# EAGLE board SLIM-ADC-16 (EAGLE 6.3)

Size 30.48 x 30.48 mm. Coordinates in mm from the lower left corner, seen from the top.
Outline: 0,0 30.48,0 30.48,30.48 0,30.48 0,0
Copper layers (1*16): Top 0.035mm / dielectric 1.5mm / Bottom 0.035mm
Design rules "SSA *": minimum track width 8mil, minimum drill 13mil, track to track 6mil, track to pad 6mil, pad to pad 6mil, via to via 6mil, smd to smd 0mil, copper to edge 0mil, drill to drill 8mil, minimum pad ring 7mil, minimum via ring 7mil, stop-mask expansion 0mil, vias tented up to drill 25mil, thermal gap 10mil

## Footprints (pad centres in the part's own frame; a part is rotated, then mirrored left to right if it is on the bottom)
0805 = smd 0.8 x 1.2: 1 -0.9,0; 2 0.9,0
EIA3216 = smd 1.4 x 1.6: A 1.4,0; C -1.4,0
SLIM_COAX_PAD = drill 1.5: P$1 0,0 | smd 1.27 x 0.635 bottom: P$2 0,-2.667
CONN-6PIN = drill 1.016 square: 1 -6.35,0 | drill 1.016: 2 -3.81,0; 3 -1.27,0; 4 1.27,0; 5 3.81,0; 6 6.35,0
SOT23 = smd 0.8 x 0.9: B 0.95,1; C 0,-1; E -0.95,1
CONN-3PIN = drill 1.016 square: 1 -2.54,0 | drill 1.016: 2 0,0; 3 2.54,0
SOT89 = smd 1.2 x 1.5: 1 -1.6,-2; 3 1.6,-2 | smd 1 x 1.5: 2 0,-2 | smd 2.4 x 3: 4 0,1.25
MSOP10 = smd 0.34 x 1.04: 1 -1,-2.2; 2 -0.5,-2.2; 3 0,-2.2; 4 0.5,-2.2; 5 1,-2.2; 6 1,2.2; 7 0.5,2.2; 8 0,2.2; 9 -0.5,2.2; 10 -1,2.2

## Placement (x,y rotation side)
C1  0.1uF  [0805]  3,8 0 top
C2  0.1uF  [0805]  7.5,3.5 270 top
C3  10uF/16V  [EIA3216]  4,4 0 top
C4  10uF/16V  [EIA3216]  17.5,5 90 top
C5  0.1uF  [0805]  14.5,4.5 270 top
C6  0.1uF  [0805]  21,10 0 top
C7  10uF/16V  [EIA3216]  21.5,12.5 180 top
C8  10uF/16V  [EIA3216]  27,16.5 270 top
C9  0.1uF  [0805]  25.5,13 180 top
C10  0.1uF  [0805]  21.5,23.75 270 top
C11  10uF/16V  [EIA3216]  27,22 90 top
C12  0.001uF  [0805]  23.5,21.5 180 top
C13  0.1uF  [0805]  6.5,10 0 top
C14  10uF/16V  [EIA3216]  7,12.5 180 top
C15  10uF/16V  [EIA3216]  10.5,9.5 0 top
C16  0.1uF  [0805]  11,13 180 top
C19  0.1uF  [0805]  7.5,23.75 270 top
C20  10uF/16V  [EIA3216]  14.5,22 90 top
C21  0.001uF  [0805]  11.5,21.5 0 top
FB1  FERRITE0805  [0805]  3,6.5 0 top
J1  COAX  [SLIM_COAX_PAD]  23,19.5 0 top
J2  COAX  [SLIM_COAX_PAD]  9,19.5 0 top
P1  CONN-6PIN  [CONN-6PIN]  3,16.5 90 top
Q1  MUN2211  [SOT23]  4,26 270 top
Q2  MUN2211  [SOT23]  6,20 270 top
R1  10  [0805]  20,7.5 90 top
R2  10  [0805]  26,7.5 270 top
R4  10  [0805]  6.5,8 180 top
R5  10  [0805]  14.5,7.5 270 top
SW1  SPDT-CONN  [CONN-3PIN]  24.5,26.5 0 top
SW2  SPDT-CONN  [CONN-3PIN]  10.5,26.5 0 top
U1  78L05  [SOT89]  11,4.5 180 top
U2  AD7685  [MSOP10]  22.5,15.5 90 top
U3  AD7685  [MSOP10]  8.5,15.5 90 top

## Library data of the parts
C1-C16 C19-C21 FB1 J1 J2 Q1 Q2 R1 R2 R4 R5 SW1 SW2 U1-U3 = SLIM
P1 = SLIM; OC_FARNELL: unknown; OC_NEWARK: unknown

## Nets
+5AD: C4.A C5.1 R1.1 R2.2 R4.1 R5.2 U1.1
+10V: C1.1 FB1.1 P1.2
ACK: P1.5 Q2.C
CONVERT: P1.4 U2.6 U3.6
GND: C1.2 C2.2 C3.C C4.C C5.2 C6.2 C7.C C8.C C9.2 C10.2 C11.C C12.2 C13.2 C14.C C15.C C16.2 C19.2 C20.C C21.2 J1.P$2 J2.P$2 P1.1 Q1.E Q2.E U1.2 U1.4 U2.4 U2.5 U3.4 U3.5
N$1: C8.A C9.1 R2.1 U2.1
N$2: C6.1 C7.A R1.2 U2.2 U2.9 U2.10
N$3: C12.1 J1.P$1 SW1.2 U2.3
N$4: C10.1 SW1.1
N$5: C11.A SW1.3
N$6: Q1.B U2.7
N$7: C2.1 C3.A FB1.2 U1.3
N$8: C15.A C16.1 R5.1 U3.1
N$9: C13.1 C14.A R4.2 U3.2 U3.9 U3.10
N$10: C21.1 J2.P$1 SW2.2 U3.3
N$11: C19.1 SW2.1
N$12: C20.A SW2.3
N$13: Q2.B U3.7
SERCLOCK: P1.3 U2.8 U3.8
WAIT: P1.6 Q1.C

## Tracks (layer width: path | path; a pad name or v marks a point on that pad's centre or on a via)
+5AD
  Top 0.254: U1.1 12.5,6.5
  Top 0.635: R5.2 12.7,6.6 U1.1 | C5.1 R5.2 | R5.2 17.3,6.6 C4.A 17.7,6.6 R1.1 R2.2 | R4.1 11.5,8 12.5,7.5 12.5,6.5
+10V
  Top 0.305: C1.1 2.08,7.98 2.02,7.98 | 2,8 2.03,8
  Top 0.381: P1.2 1.8,11.49 1.8,8.3 2,8.1 2,8
  Top 0.508: FB1.1 2.1,7.9 2.02,7.98 2,8
ACK
  Top 0.254: Q2.C 4.19,20.31 P1.5
CONVERT
  Top 0.254: U2.6 20.3,17.7 19,18.5 19,24.75 15.5,28.25 5,28.25 4,27.5 4,24 6,22 6,18.5 P1.4 U3.6
GND  (via drill 0.38, 0.51)
  Top 0.254: C12.2 22.5,21.5 | 10.5,16.5 U3.5 U3.4 | U2.5 U2.4
  Top 0.508: C1.2 3.9,9.25 P1.1
  other vias: 0.64,15.24 0.64,19.05 0.64,22.86 0.64,26.67 0.64,29.84 0.64,11.43 0.64,7.62 0.64,3.81 0.64,0.64 3.81,0.64 7.62,0.64 11.43,0.64 15.24,0.64 19.05,0.64 22.86,0.64 26.67,0.64 29.84,0.64 29.84,3.81 29.84,7.62 29.84,11.43 29.84,15.24 29.84,19.05 29.84,22.86 29.84,26.67 29.84,29.84 26.67,29.84 22.86,29.84 19.05,29.84 15.24,29.84 11.43,29.84 7.62,29.84 3.81,29.84 5,26.05 7.25,11.25 9.25,14 23.25,14 23,10.5 24.5,17.5 10.5,17.5 21.5,21.75 14,19 15,19 25.38,19.25 28.5,19.25 7,22 8,22 14.5,2.5 17,2 18,2
  pour Top (isolate 0.254, no thermals): 0,0 30.48,0 30.48,30.48 0,30.48
  pour Bottom (isolate 0.254, no thermals): 0,0 30.48,0 30.48,30.48 0,30.48
N$1
  Top 0.34: U2.1 26.5,14.5
  Top 0.381: C8.A 26.6,15.1 arc90 26.5,15
  Top 0.635: R2.1 arc90 26.4,8.8 C9.1 arc90 26.5,13.1 26.5,14.5 26.5,15
N$2
  Top 0.34: U2.2 20.5,15 U2.9 20.2,15 20.1,14.9
  Top 0.356: U2.10 20.1,14.5
  Top 0.381: C7.A 20.1,14.5 20.1,14.9
  Top 0.635: R1.2 20,9.9 arc-90 C6.1 C7.A
N$3
  Top 0.305: 23,16 23.5,15.5 U2.3
  Top 0.381: C12.1 24.5,21
  Top 1.016: SW1.2 24.5,21 J1.P$1 23,16
N$4
  Top 0.254: SW1.1 22,26.5
  Top 1.016: C10.1 22,26.5
N$5
  Top 0.254: 27,23.5 C11.A
  Top 1.016: SW1.3 27,23.5
N$6
  Top 0.254: U2.7 18.5,16 18,16.5 18,24.5 14.75,27.75 6.75,27.75 6.5,27.5 6.5,26 5.5,25 5.05,25 Q1.B
N$7
  Top 0.635: FB1.2 5.5,4.9 5.5,4.5 | 5.5,4.5 5.5,4 C3.A | 5.5,4.5 5.9,4.5 6,4.4 C2.1 7.5,4.6 U1.3
N$8
  Top 0.305: 12,13.2 12,14.5 U3.1 10.5,14.5
  Top 0.381: 11.9,13.1 12,13.2
  Top 0.635: 11.9,13.1 C16.1 C15.A R5.1
N$9
  Top 0.305: C13.1 5.6,9.9
  Top 0.34: U3.10 5.5,14.5 | U3.2 U3.9 5.5,15
  Top 0.381: C14.A 5.5,13.1 5.5,14.5 5.5,15
  Top 0.635: R4.2 5.6,9.9 5.5,10.5 | C13.1 C14.A
N$10
  Top 0.305: 9,16 9.5,15.5 U3.3
  Top 0.34: U3.3 11,15.5
  Top 0.381: C21.1 10.5,21.5
  Top 1.016: SW2.2 10.5,21.5 10.5,21 J2.P$1 9,16
N$11
  Top 1.016: C19.1 SW2.1
N$12
  Top 1.016: SW2.3 C20.A
N$13
  Top 0.254: Q2.B 7.5,18.75 7.5,16.5 7,16 U3.7
SERCLOCK
  Top 0.254: U2.8 21,15.5 21.5,16 21.5,18.5 20,20 20,25 16.25,28.75 3.25,28.75 1.75,27.25 1.75,16 2.52,15.23 P1.3 4.23,15.23 4.5,15.5 U3.8
WAIT
  Top 0.254: Q1.C P1.6

## Text on the board
tPlace: REV 0 | PWB-ADC10 | AH
bPlace: MDAT | PDAT | CONV | CLK | PHASE | MAG | +10V | GND | SLIM-ADC-16 | 2012/12/4